# EAGLE board Potentiometer and LEDs PCB (EAGLE 9.7.0)
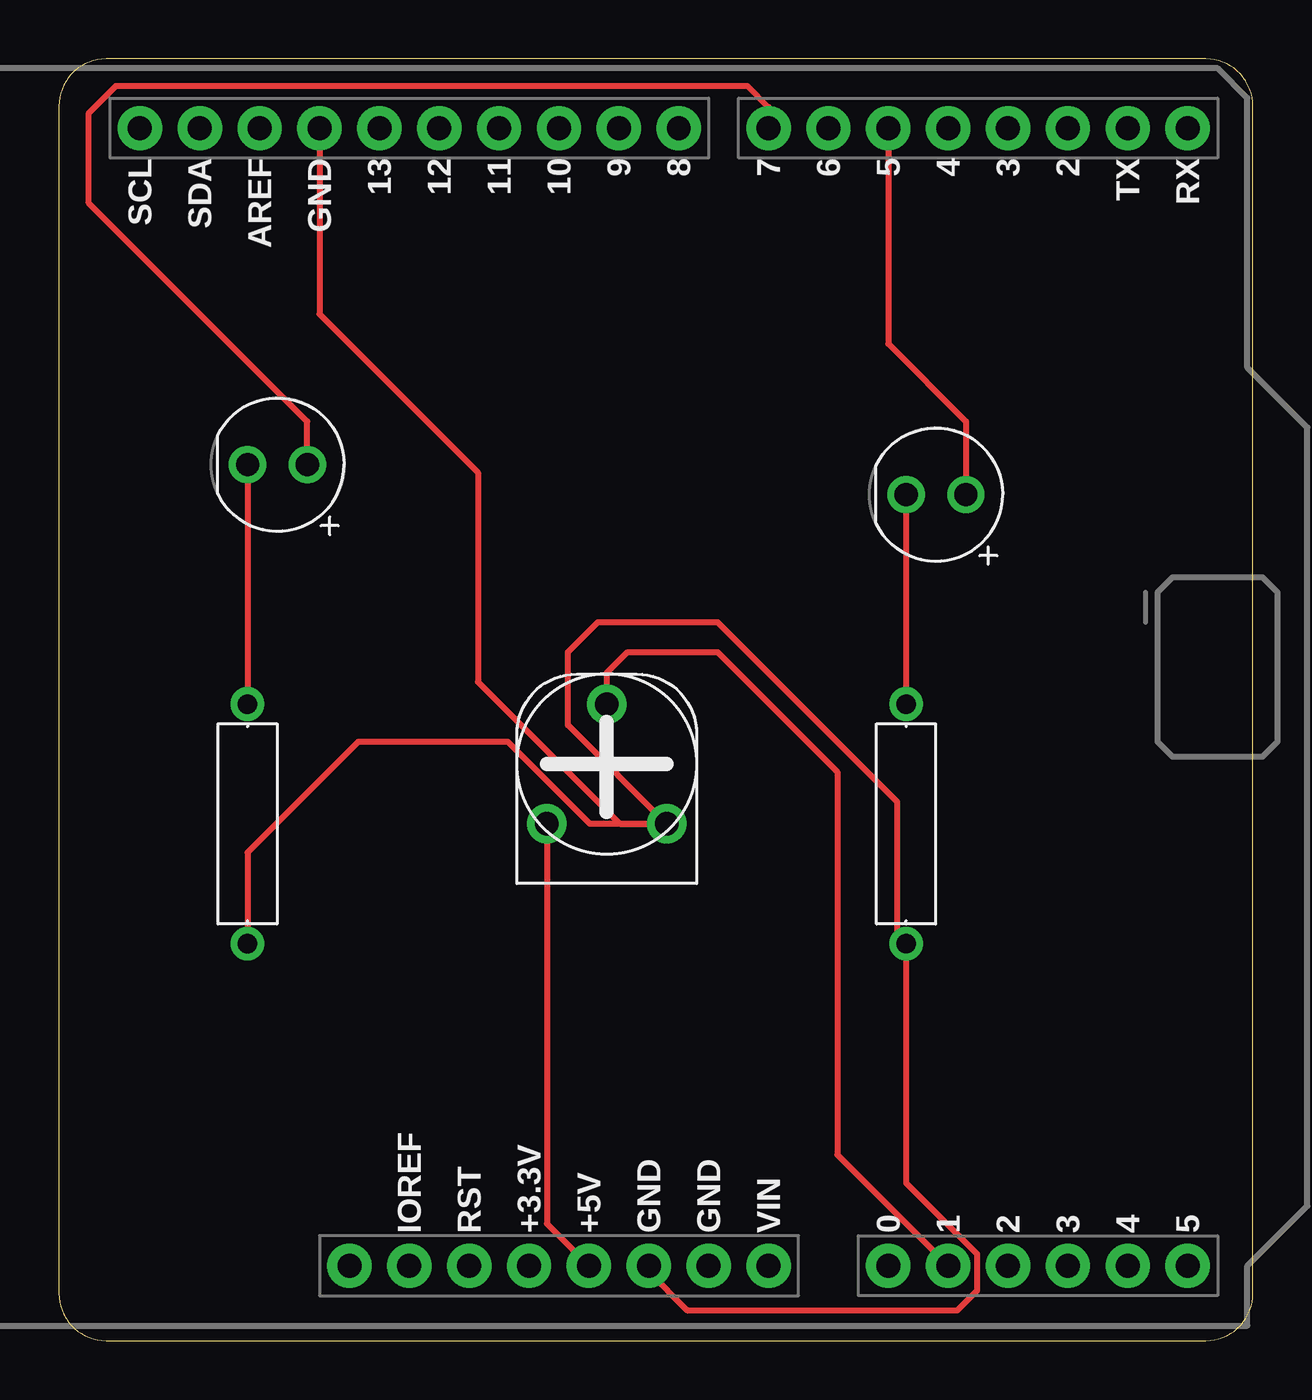
[diagram p0: board, top side]

Size 50.65 x 54.37 mm. Coordinates in mm from the lower left corner, seen from the top.
Outline: 48.65,0 arc90 50.65,2 50.65,52.37 arc90 48.65,54.37 2,54.37 arc90 0,52.37 0,2 arc90 2,0 48.65,0
Copper layers (1*16): Top 0.035mm / dielectric 1.5mm / Bottom 0.035mm
Design rules "default": minimum track width 6mil, minimum drill 0.35mm, track to track 6mil, track to pad 6mil, pad to pad 6mil, via to via 6mil, smd to smd 6mil, copper to edge 40mil, drill to drill 6mil, minimum pad ring 10mil, minimum via ring 8mil, stop-mask expansion 4mil, vias tented up to drill 0mil, thermal gap 10mil

## Footprints (pad centres in the part's own frame; a part is rotated, then mirrored left to right if it is on the bottom)
LEDRD254W60D565H860B = drill 0.981 pad 1.581: 1 -1.27,0; 2 1.27,0
RESAD1016W63L850D250B = drill 0.83 pad 1.43: 1 -5.08,0; 2 5.08,0
HA-06-SM065 = drill 1 pad 1.676: 1 -2.54,-2.54; 2 0,2.54; 3 2.54,-2.54
ARDUINO-UNO-R3-SHIELD = drill 1.016 pad 1.88: 3.3V 24.13,-2.54; 5V 24.13,0; A0 24.13,12.7; A1 24.13,15.24; A2 24.13,17.78; A3 24.13,20.32; A4 24.13,22.86; A5 24.13,25.4; AREF -24.13,-13.97; D2 -24.13,20.32; D3 -24.13,17.78; D4 -24.13,15.24; D5 -24.13,12.7; D6 -24.13,10.16; D7 -24.13,7.62; D8 -24.13,3.81; D9 -24.13,1.27; D10 -24.13,-1.27; D11 -24.13,-3.81; D12 -24.13,-6.35; D13 -24.13,-8.89; GND@0 24.13,2.54; GND@1 24.13,5.08; GND@2 -24.13,-11.43; IOREF 24.13,-7.62; NC 24.13,-10.16; RES 24.13,-5.08; RX -24.13,25.4; SCL -24.13,-19.05; SDA -24.13,-16.51; TX -24.13,22.86; VIN 24.13,7.62

## Placement (x,y rotation side)
D1  RED  [LEDRD254W60D565H860B]  9.27,37.16 180 top
D2  RED  [LEDRD254W60D565H860B]  37.21,35.89 180 top
R2  1k  [RESAD1016W63L850D250B]  35.94,21.92 90 top
R3  1k  [RESAD1016W63L850D250B]  8,21.92 90 top
RPOT1  250k  [HA-06-SM065]  23.24,24.46 0 top
U1  ARDUINO-UNO-R3-SHIELD  [ARDUINO-UNO-R3-SHIELD]  22.48,27.3 270 top

## Library data of the parts
D1 D2 = Tinkercad; CATEGORY: Opto-Electronic; SUB-CATEGORY: LED; VALUE: LED_RED
R2 R3 RPOT1 U1 = Tinkercad

## Nets
D1_C: D1.2 R3.2
D2_C: D2.2 R2.2
U1_5V: RPOT1.1 U1.5V
U1_A1: RPOT1.2 U1.A1
U1_D5: D2.1 U1.D5
U1_D7: D1.1 U1.D7
U1_GND: R2.1 R3.1 RPOT1.3 U1.GND@0 U1.GND@2

## Tracks (layer width: path | path; a pad name or v marks a point on that pad's centre or on a via)
D1_C
  Top 0.254: D1.2 R3.2
D2_C
  Top 0.254: D2.2 R2.2
U1_5V
  Top 0.254: RPOT1.1 20.7,4.96 U1.5V
U1_A1
  Top 0.254: RPOT1.2 23.24,28.32 24.13,29.21 27.94,29.21 33.02,24.13 33.02,7.88 U1.A1
U1_D5
  Top 0.254: U1.D5 35.19,42.29 38.48,38.99 D2.1
U1_D7
  Top 0.254: D1.1 10.54,38.99 1.27,48.26 1.27,52.07 2.43,53.23 29.21,53.23 30.11,52.33 U1.D7
U1_GND
  Top 0.254: U1.GND@2 11.05,43.55 17.78,36.83 17.78,27.94 23.8,21.92 RPOT1.3 | RPOT1.3 22.53,21.92 19.05,25.4 12.7,25.4 8,20.7 R3.1 | R2.1 35.94,16.51 | 35.94,16.51 35.94,6.68 38.94,3.68 38.94,2.11 38.1,1.27 26.67,1.27 25.02,2.92 U1.GND@0 | RPOT1.3 21.59,26.11 21.59,29.21 22.86,30.48 27.94,30.48 35.56,22.86 35.56,16.89 35.94,16.51